# EAGLE board fuil_oil_counter (EAGLE 6.6.0)
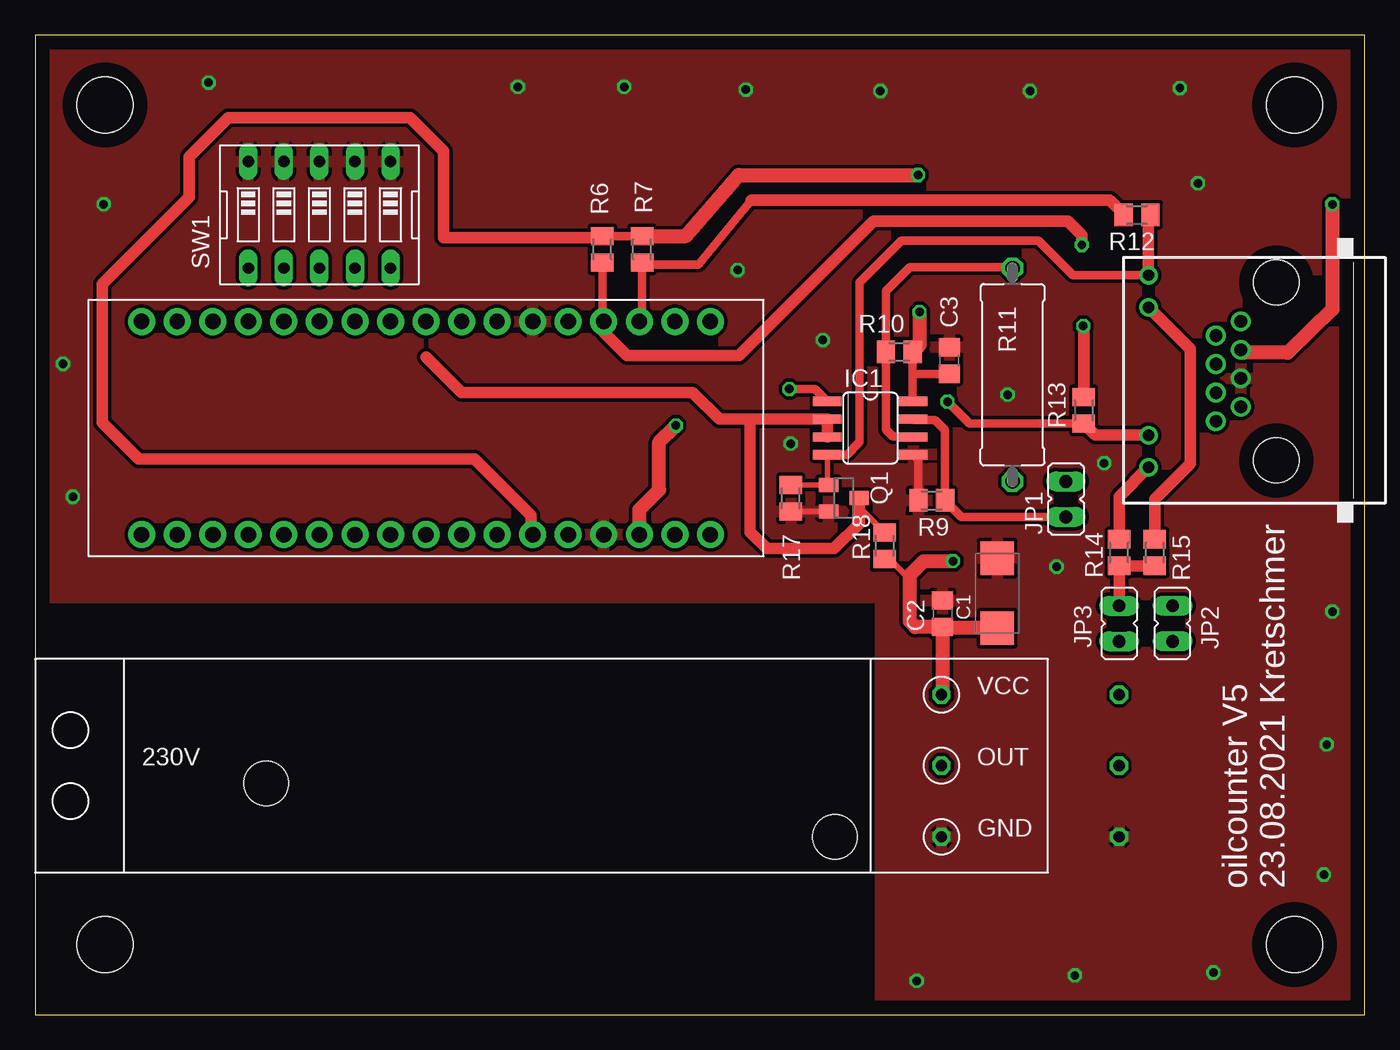
[diagram p0: board, top side]
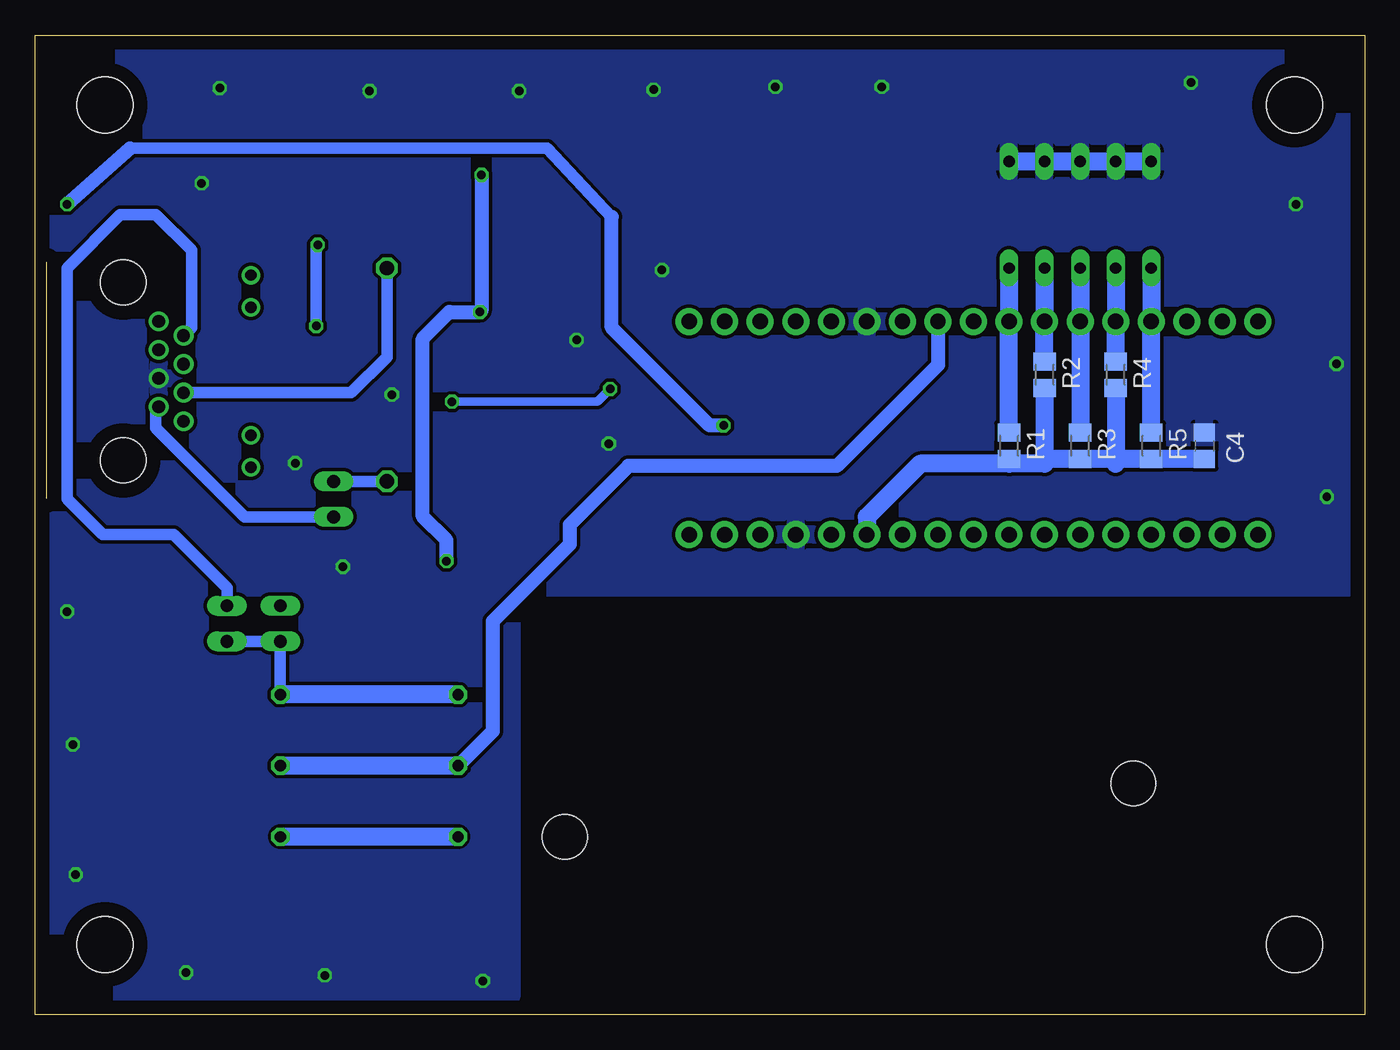
[diagram p1: board, bottom side, seen from below]

Size 95 x 70 mm. Coordinates in mm from the lower left corner, seen from the top.
Outline: 0,0 95,0 95,70 0,70 0,0
Copper layers (1*16): Top 0.035mm / dielectric 1.5mm / Bottom 0.035mm
Design rules "default": minimum track width 10mil, minimum drill 24mil, track to track 8mil, track to pad 8mil, pad to pad 8mil, via to via 8mil, smd to smd 8mil, copper to edge 40mil, drill to drill 8mil, minimum pad ring 10mil, minimum via ring 8mil, stop-mask expansion 4mil, vias tented up to drill 0mil, thermal gap 10mil
Net classes: 0 default: clearance 0.25 mm
Holes 4 mm at 90,5 90,65 5,65 5,5

## Footprints (pad centres in the part's own frame; a part is rotated, then mirrored left to right if it is on the bottom)
SMC_C = smd 2.4 x 2.4: + -2.5,0; - 2.5,0
C0805 = smd 1.3 x 1.5: 1 -0.95,0; 2 0.95,0
SO08 = smd 0.66 x 2.032: 1 -1.905,-3.073; 2 -0.635,-3.073; 3 0.635,-3.073; 4 1.905,-3.073; 5 1.905,3.073; 6 0.635,3.073; 7 -0.635,3.073; 8 -1.905,3.073
JP1 = drill 0.914 long: 1 0,-1.27; 2 0,1.27
SOT23 = smd 1 x 1.4: 1 -0.95,-1.1; 2 0.95,-1.1; 3 0,1.1
M0805 = smd 1.3 x 1.6: 1 -0.95,0; 2 0.95,0
P0613/15 = drill 1.016 octagon: 1 -7.62,0; 2 7.62,0
EDG-05 = drill 0.813 long: 1 -5.08,-3.81; 2 -2.54,-3.81; 3 0,-3.81; 4 2.54,-3.81; 5 5.08,-3.81; 6 5.08,3.81; 7 2.54,3.81; 8 0,3.81; 9 -2.54,3.81; 10 -5.08,3.81
ARDUINOMICRO = drill 1.1 pad 1.93: P$1 -20.32,7.62; P$2 -17.78,7.62; P$3 -15.24,7.62; P$4 -12.7,7.62; P$5 -10.16,7.62; P$6 -7.62,7.62; P$7 -5.08,7.62; P$8 -2.54,7.62; P$9 0,7.62; P$10 2.54,7.62; P$11 5.08,7.62; P$12 12.7,-7.62; P$13 10.16,-7.62; P$14 12.7,7.62; P$15 15.24,7.62; P$16 17.78,7.62; P$17 20.32,7.62; P$18 20.32,-7.62; P$19 17.78,-7.62; P$20 15.24,-7.62; P$21 7.62,7.62; P$22 10.16,7.62; P$23 7.62,-7.62; P$24 5.08,-7.62; P$25 2.54,-7.62; P$26 0,-7.62; P$27 -2.54,-7.62; P$28 -5.08,-7.62; P$29 -7.62,-7.62; P$30 -10.16,-7.62; P$31 -12.7,-7.62; P$32 -15.24,-7.62; P$33 -17.78,-7.62; P$34 -20.32,-7.62
POWER_DETECT = drill 0.8 octagon: GND_1 -7.62,2.54; GND_PIN 5.08,2.54; OUT 5.08,7.62; OUT_2 -7.62,7.62; VCC 5.08,12.7; VCC_2 -7.62,12.7 | hole 3.2: -15.24,2.54; -55.88,6.35
RJ45-NO-SHIELD-WITH_LED = drill 0.9 pad 1.4: 1 3.82,2.74; 2 2.8,4.52; 3 1.78,2.74; 4 0.76,4.52; 5 -0.26,2.74; 6 -1.28,4.52; 7 -2.3,2.74; 8 -3.32,4.52 | drill 0.8: LED1_A -6.61,9.33; LED1_K -4.32,9.33; LED2_A 4.82,9.33; LED2_K 7.11,9.33 | hole 3.251: -6.115,0.2; 6.6,0.2

## Placement (x,y rotation side)
C1  10µF/16V  [SMC_C]  68.75,30.11 90 top
C2  100nF  [C0805]  64.84,28.64 90 top
C3  100nF  [C0805]  65.33,46.73 90 top
C4  100nF  [C0805]  11.43,40.64 90 bottom
IC1  MAX485  [SO08]  59.69,41.91 270 top
JP1  [JP1]  73.66,36.83 0 top
JP2  [JP1]  81.28,27.94 180 top
JP3  [JP1]  77.47,27.94 0 top
Q1  BSS123  [SOT23]  57.8,36.9 270 top
R1  10k  [M0805]  25.4,40.64 270 bottom
R2  10k  [M0805]  22.86,45.72 270 bottom
R3  10k  [M0805]  20.32,40.64 270 bottom
R4  10k  [M0805]  17.78,45.72 270 bottom
R5  10k  [M0805]  15.24,40.64 270 bottom
R6  10k  [M0805]  40.54,54.68 270 top
R7  10k  [M0805]  43.38,54.68 270 top
R9  20k  [M0805]  64.08,36.74 180 top
R10  20k  [M0805]  61.76,47.36 180 top
R11  120  [P0613/15]  69.85,45.72 270 top
R12  20  [M0805]  78.74,57.15 180 top
R13  20  [M0805]  74.93,43.18 90 top
R14  1k  [M0805]  77.47,33.02 270 top
R15  1k  [M0805]  80.01,33.02 270 top
R17  10k  [M0805]  54,36.9 270 top
R18  10k  [M0805]  60.7,33.5 90 top
SW1  [EDG-05]  20.32,57.15 180 top
U$1  ARDUINOMICRO  [ARDUINOMICRO]  27.94,41.91 0 top
U$2  POWER_DETECT  [POWER_DETECT]  72.39,10.16 0 top
U$3  RJ45_LED_ALEX  [RJ45-NO-SHIELD-WITH_LED]  88.9,45.72 90 top

## Library data of the parts
C1-C4 R1-R7 R9-R15 = rcl
IC1 = maxim; MPN: MAX3468ESA+T; OC_FARNELL: unknown; OC_NEWARK: 76K6724
JP1-JP3 = jumper
Q1 = transistor-small-signal
R17 R18 = resistor
SW1 = special
U$1 = adafruit
U$2 = 1_Alex
U$3 = con-tycoelectronics

## Nets
230V_DETECT: U$1.P$10 U$2.OUT U$2.OUT_2
+5V: C1.+ C2.1 C3.1 C4.1 IC1.8 JP2.2 JP3.1 R1.2 R2.2 R3.2 R4.2 R5.2 R6.1 R7.1 R10.1 R18.1 U$1.P$23 U$2.VCC U$2.VCC_2
+12V: U$1.P$20 U$3.3
EN: IC1.2 IC1.3 Q1.3 R18.2
GND: C1.- C2.2 C3.2 C4.2 IC1.5 Q1.2 R9.2 R17.2 SW1.1 SW1.2 SW1.3 SW1.4 SW1.5 U$1.P$12 U$1.P$21 U$2.GND_1 U$2.GND_PIN U$3.5
N$1: R1.1 SW1.10 U$1.P$8
N$2: R2.1 SW1.9 U$1.P$7
N$3: R3.1 SW1.8 U$1.P$6
N$4: R4.1 SW1.7 U$1.P$5
N$5: R5.1 SW1.6 U$1.P$4
N$6: JP2.1 U$3.2
N$7: JP1.2 R11.2
N$8: R14.1 U$3.LED1_A
N$9: R15.1 U$3.LED2_A
N$11: R6.2 R13.2 U$1.P$14
N$12: R7.2 R12.2 U$1.P$15
N$13: JP3.2 R14.2 R15.2
RS485_A: IC1.6 R10.2 R11.1 U$3.6
RS485_B: IC1.7 JP1.1 R9.1 U$3.7
RX_K: IC1.1 R13.1 U$3.LED1_K
TX_K: IC1.4 Q1.1 R12.1 R17.1 U$3.LED2_K

## Tracks (layer width: path | path; a pad name or v marks a point on that pad's centre or on a via)
230V_DETECT
  Bottom 1.016: U$1.P$10 30.48,46.42 37.7,39.2 52.6,39.2 56.8,35 56.8,33.6 62.3,28.1 62.3,20.25 U$2.OUT_2
+5V  (via drill 0.6)
  Top 0.406: R18.1 61.05,32.55 62.5,31.1
  Top 0.61: R10.1 62.71,45.8 | 62.71,45.8 62.71,43.87 IC1.8 | C3.1 62.73,45.78 62.71,45.8 | R6.1 R7.1
  Top 0.813: U$1.P$23 35.46,34.39 35.46,35.66 31.42,39.7 7.4,39.7 4.8,42.3 4.8,52.2 11,58.4 11,61.3 13.8,64.1 26.8,64.1 29.2,61.7 29.2,55.53 40.44,55.53 R6.1
  Top 1.016: C1.+ 64.92,27.61 C2.1 | C2.1 64.84,22.93 U$2.VCC_2 | R7.1 46.53,55.63 50.3,60 v63.1,60 | v63.2,50.2 63.2,47.85 R10.1 | C2.1 62.91,27.69 62.5,28.1 62.5,31.1 62.5,31.4 63.5,32.4 v65.6,32.4
  Bottom 0.813: U$2.VCC JP3.1 JP2.2
  Bottom 1.016: v63.1,60 63.1,50.3 v63.2,50.2 65.4,50.2 67.3,48.3 67.3,35.6 65.6,33.9 v65.6,32.4
  Bottom 1.27: R4.2 17.78,39.69 | R2.2 22.86,39.69 | 17.78,39.69 R5.2 C4.1 | 17.78,39.69 17.78,39.37 | 17.78,39.69 R3.2 22.86,39.69 | 22.86,39.69 22.86,39.37 25.4,39.37 | 25.4,39.37 R1.2 | 25.4,39.37 31.75,39.37 35.56,35.56 U$1.P$23
+12V  (via drill 0.6)
  Top 1.016: U$1.P$20 43.18,36.08 44.6,37.5 44.6,40.9 v45.8,42.1 | v92.7,57.9 92.7,50.4 89.5,47.3 86.36,47.3 U$3.3
  Bottom 0.813: 53.8,57 58.4,61.9 88.2,61.9
  Bottom 1.016: v45.8,42.1 46.8,42.1 53.8,49.1 53.8,57 | 88.2,61.9 v92.7,57.9
EN
  Top 0.406: Q1.3 58.9,36.25 R18.2
  Top 0.813: IC1.3 IC1.2 51,42.55 | 51,42.55 48.9,42.55 46.99,44.45 30.48,44.45 27.94,46.99 | Q1.3 58.9,35.1 57.1,33.3 52.3,33.3 51.1,34.5 51.1,42.45 51,42.55
GND  (via drill 0.6)
  Top 0.406: R17.2 Q1.2
  Top 0.61: R9.2 63.13,39.64 IC1.5
  Bottom 1.27: SW1.5 SW1.4 SW1.3 SW1.2 SW1.1
  other vias: 34.5,66.3 42.1,66.3 50.8,66.1 60.4,66 71.1,66 81.8,66.2 12.4,66.6 4.9,57.9 92.7,28.8 92.3,19.3 92.1,10 84.2,3 74.3,2.8 63,2.4 2,46.5 2.7,37 83.1,59.4 56.3,48.2 50.2,53.2 69.5,44.3 76.4,39.4 73,32 54,40.8
  pour Bottom: 1.27,68.58 1.27,30.48 60.96,30.48 60.96,1.27 93.98,1.27 93.98,69.85 1.27,69.85
  pour Top: 1.1,69.8 94.4,69.8 94.4,1.1 60.4,1.1 60.4,29.8 0.9,29.8 0.9,69.7
N$1
  Bottom 1.27: R1.1 U$1.P$8 SW1.10
N$2
  Bottom 1.27: R2.1 U$1.P$7 SW1.9
N$3
  Bottom 1.27: R3.1 U$1.P$6 SW1.8
N$4
  Bottom 1.27: R4.1 U$1.P$5 SW1.7
N$5
  Bottom 1.27: R5.1 U$1.P$4 SW1.6
N$6
  Bottom 0.813: JP2.1 81.28,30.48 85.09,34.29 90.17,34.29 92.71,36.83 92.71,53.34 88.9,57.15 86.36,57.15 83.82,54.61 83.82,49.08 U$3.2
N$7
  Bottom 0.813: JP1.2 R11.2
N$8
  Top 0.813: R14.1 77.47,37.01 U$3.LED1_A
N$9
  Top 0.813: R15.1 80.01,36.83 82.55,39.37 82.55,47.56 U$3.LED2_A
N$11  (via drill 0.6)
  Top 0.61: R6.2 40.54,49.63 U$1.P$14
  Top 0.813: U$1.P$14 40.64,48.76 42.3,47.1 50.3,47.1 59.9,56.7 73.8,56.7 74.8,55.7 v74.8,55 | v74.9,49.2 74.93,49.17 R13.2
  Bottom 0.813: v74.8,55 74.9,54.9 v74.9,49.2
N$12
  Top 0.61: U$1.P$15 43.38,49.73 R7.2 43.51,53.6 47.4,53.6 51.15,58.15
  Top 0.813: 51.15,58.15 51.2,58.2 76.8,58.2 77.79,57.21 R12.2
N$13
  Top 0.813: JP3.2 R14.2 R15.2
RS485_A
  Top 0.61: IC1.6 62.74,41.3 61.3,41.3 60.81,41.79 R10.2 60.81,51.71 62.5,53.4 69.79,53.4 R11.1
  Bottom 0.813: U$3.6 72.4,44.44 69.85,46.99 R11.1
RS485_B
  Top 0.61: JP1.1 66.21,35.56 R9.1 65.03,41.77 64.3,42.5 62.81,42.5 IC1.7
  Bottom 0.813: JP1.1 80.01,35.56 86.36,41.91 86.36,43.22 U$3.7
RX_K  (via drill 0.6)
  Top 0.61: R13.1 66.77,42.23 v65.2,43.8 | v53.9,44.7 55.73,44.7 IC1.1
  Top 0.813: U$3.LED1_K 75.76,41.4 R13.1
  Bottom 0.61: v65.2,43.8 54.8,43.8 v53.9,44.7
TX_K
  Top 0.406: R17.1 Q1.1 56.62,37.85 IC1.4
  Top 0.61: U$3.LED2_K 74.17,52.83 71.7,55.3 61.9,55.3 58.9,52.3 58.9,40.9 58,40 IC1.4
  Top 0.813: U$3.LED2_K 79.57,57.03 R12.1

## Text on the board
tPlace: oilcounter V5 / 23.08.2021 Kretschmer